# Altium PCB PCB_if-remote-control_2024-05-07.pcbdoc
Units mm, origin at the board's own origin, x right, y up, seen from the top; angles counter-clockwise.
Board outline 259.83 x 201.79 mm, 2 copper layers (Top Layer, Bottom Layer); 88 components, 109 nets, 317 pads, 10 vias.
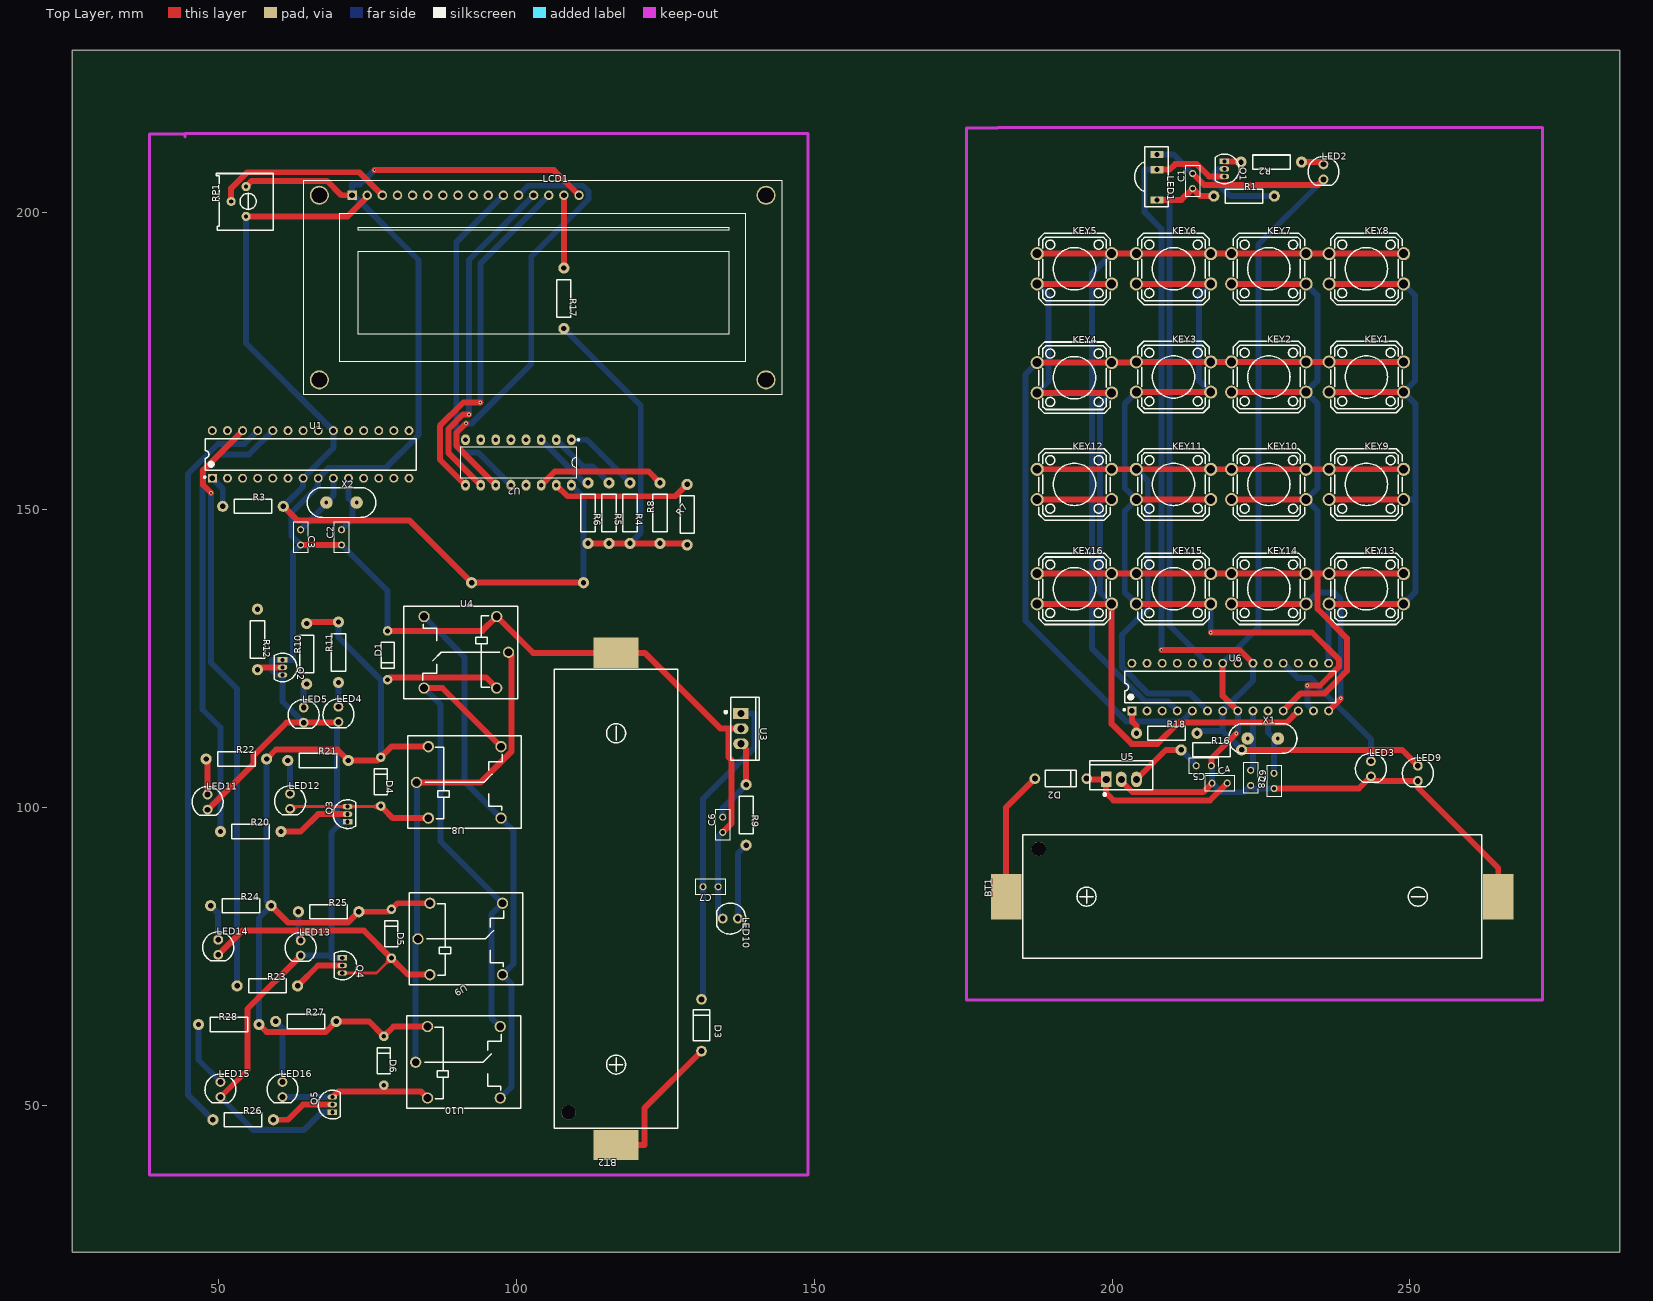
[diagram p0: Top Layer view]
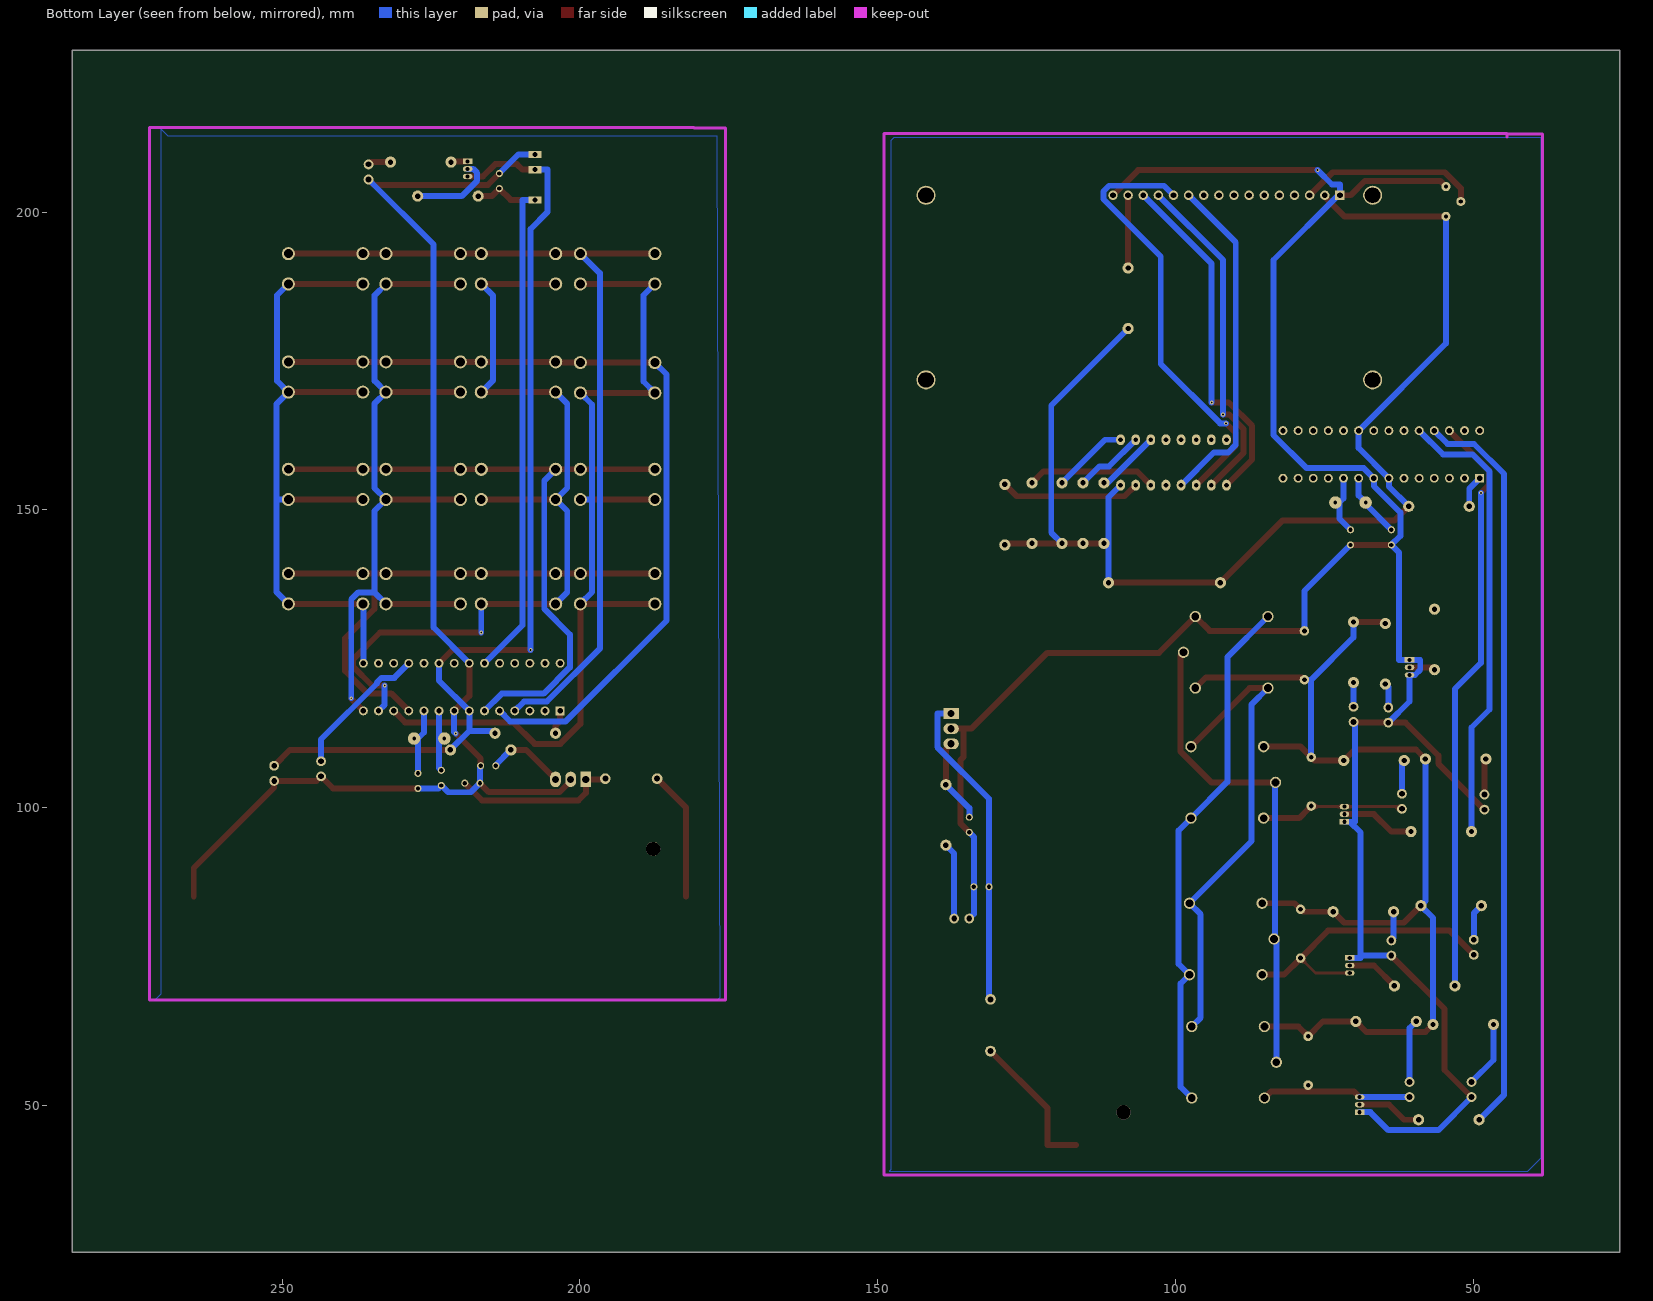
[diagram p1: Bottom Layer view, seen from below]

## Layer stack, top to bottom
Top Layer: signal copper (thickness not stored)
Dielectric: dielectric 0.32, FR-4, Dk 4.8
Bottom Layer: signal copper (thickness not stored)

## Board outline
285.234,25.4 25.4,25.4 25.4,227.195 285.234,227.195

## Components (designator, comment, footprint, x,y, rotation, side; value= is the part's Value field where it differs from the comment)
BT1 "BH-18650-B1BA002" BATTERY-SMD_18650-1S-L77.1-W20.7-1 223.516,85.086 r90 top
BT2 "BH-18650-B1BA002" BATTERY-SMD_18650-1S-L77.1-W20.7-1 116.709,84.705 r180 top
C1 "1u" RAD-0.1 213.518,205.237 r90 top
C2 "1u" RAD-0.1 70.608,145.411 r90 top
C3 "1u" RAD-0.1 63.75,145.411 r270 top
C4 "1u" RAD-0.1 218.055,104.136 r0 top
C5 "1u" RAD-0.1 215.388,107.057 r180 top
C6 "1u" RAD-0.1 134.616,97.151 r90 top
C7 "1u" RAD-0.1 132.584,86.737 r180 top
C8 "1u" RAD-0.1 223.262,105.025 r270 top
C9 "1u" RAD-0.1 227.199,104.517 r90 top
D1 "1N4148" DO-35_BD2.0-L4.2-P8.20-D0.5-RD 78.355,125.599 r90 top
D2 "1N4007" DO-41_BD2.4-L4.7-P8.70-D0.9-RD 191.385,104.898 r180 top
D3 "1N4007" DO-41_BD2.4-L4.7-P8.70-D0.9-RD 131.06,63.496 r270 top
D4 "1N4148" DO-35_BD2.0-L4.2-P8.20-D0.5-RD 77.212,104.39 r270 top
D5 "1N4148" DO-35_BD2.0-L4.2-P8.20-D0.5-RD 78.99,78.863 r270 top
D6 "1N4148" DO-35_BD2.0-L4.2-P8.20-D0.5-RD 77.72,57.527 r270 top
KEY1 "K4-12×12_TH" KEY-TH_4P-L12.0-W12.0-P5.00-LS12.5 242.693,172.335 r0 top
KEY2 "K4-12×12_TH" KEY-TH_4P-L12.0-W12.0-P5.00-LS12.5 226.31,172.335 r0 top
KEY3 "K4-12×12_TH" KEY-TH_4P-L12.0-W12.0-P5.00-LS12.5 210.308,172.335 r0 top
KEY4 "K4-12×12_TH" KEY-TH_4P-L12.0-W12.0-P5.00-LS12.5 193.671,172.208 r0 top
KEY5 "K4-12×12_TH" KEY-TH_4P-L12.0-W12.0-P5.00-LS12.5 193.671,190.496 r0 top
KEY6 "K4-12×12_TH" KEY-TH_4P-L12.0-W12.0-P5.00-LS12.5 210.308,190.496 r0 top
KEY7 "K4-12×12_TH" KEY-TH_4P-L12.0-W12.0-P5.00-LS12.5 226.31,190.496 r0 top
KEY8 "K4-12×12_TH" KEY-TH_4P-L12.0-W12.0-P5.00-LS12.5 242.693,190.496 r0 top
KEY9 "K4-12×12_TH" KEY-TH_4P-L12.0-W12.0-P5.00-LS12.5 242.693,154.301 r0 top
KEY10 "K4-12×12_TH" KEY-TH_4P-L12.0-W12.0-P5.00-LS12.5 226.31,154.301 r0 top
KEY11 "K4-12×12_TH" KEY-TH_4P-L12.0-W12.0-P5.00-LS12.5 210.308,154.301 r0 top
KEY12 "K4-12×12_TH" KEY-TH_4P-L12.0-W12.0-P5.00-LS12.5 193.671,154.301 r0 top
KEY13 "K4-12×12_TH" KEY-TH_4P-L12.0-W12.0-P5.00-LS12.5 242.693,136.775 r0 top
KEY14 "K4-12×12_TH" KEY-TH_4P-L12.0-W12.0-P5.00-LS12.5 226.31,136.775 r0 top
KEY15 "K4-12×12_TH" KEY-TH_4P-L12.0-W12.0-P5.00-LS12.5 210.308,136.775 r0 top
KEY16 "K4-12×12_TH" KEY-TH_4P-L12.0-W12.0-P5.00-LS12.5 193.671,136.775 r0 top
LCD1 "LCD1602" LCD1602 104.39,187.344 r0 top
LED1 "TSOP1736" SENSOR-TH_TSOP17XX 207.549,205.872 r270 top
LED2 "LED-TH-5mm_G" LED-TH_BD5.0_GREEN 235.489,206.761 r0 top
LED3 "ir26-21c" LED-TH_BD5.0_GREEN 243.455,106.549 r0 top
LED4 "LED-TH-5mm_G" LED-TH_BD5.0_GREEN 70.1,115.693 r0 top
LED5 "LED-TH-5mm_G" LED-TH_BD5.0_GREEN 64.258,115.566 r0 top
LED9 "LED-TH-5mm_G" LED-TH_BD5.0_GREEN 251.329,105.787 r0 top
LED10 "LED-TH-5mm_G" LED-TH_BD5.0_GREEN 135.886,81.403 r270 top
LED11 "LED-TH-5mm_G" LED-TH_BD5.0_GREEN 48.129,100.961 r0 top
LED12 "LED-TH-5mm_G" LED-TH_BD5.0_GREEN 61.972,101.088 r0 top
LED13 "LED-TH-5mm_G" LED-TH_BD5.0_GREEN 63.75,76.45 r0 top
LED14 "LED-TH-5mm_G" LED-TH_BD5.0_GREEN 49.907,76.577 r0 top
LED15 "LED-TH-5mm_G" LED-TH_BD5.0_GREEN 50.288,52.701 r0 top
LED16 "LED-TH-5mm_G" LED-TH_BD5.0_GREEN 60.702,52.701 r0 top
Q1 "2N3906(TO-92)" TO-92-3_L4.9-W3.7-P1.27-L 218.852,207.269 r270 top
Q2 "2N3904(TO-92)" ? 60.702,123.567 r270 top
Q3 "2N3904(TO-92)" ? 71.624,98.929 r90 top
Q4 "2N3904(TO-92)" ? 70.735,73.529 r270 top
Q5 "2N3904(TO-92)" ? 69.084,50.161 r90 top
R1 "1k" R_AXIAL-0.4 222.154,202.697 r0 top
R2 "1k" R_AXIAL-0.4 226.726,208.412 r180 top
R3 "10k" R_AXIAL-0.4 55.749,150.618 r0 top
R4 "10k" R_AXIAL-0.4 119.058,149.475 r270 top
R5 "10k" R_AXIAL-0.4 115.534,149.475 r270 top
R6 "10k" R_AXIAL-0.4 112.01,149.475 r270 top
R7 "10k" R_AXIAL-0.4 128.647,149.221 r90 top
R8 "10k" R_AXIAL-0.4 124.075,149.475 r90 top
R9 "1k" R_AXIAL-0.4 138.553,98.802 r270 top
R10 "1k" R_AXIAL-0.4 64.766,125.853 r90 top
R11 "1k" R_AXIAL-0.4 70.1,126.107 r90 top
R12 "1k" R_AXIAL-0.4 56.511,128.266 r270 top
R16 "1k" R_AXIAL-0.4 216.658,109.724 r0 top
R17 "470" R_AXIAL-0.4 107.946,185.543 r270 top
R18 "10k" R_AXIAL-0.4 209.165,112.518 r0 top
R20 "1k" R_AXIAL-0.4 55.368,96.008 r0 top
R21 "1k" R_AXIAL-0.4 66.671,107.946 r0 top
R22 "1k" R_AXIAL-0.4 52.955,108.2 r0 top
R23 "1k" R_AXIAL-0.4 58.162,70.1 r0 top
R24 "1k" R_AXIAL-0.4 53.717,83.562 r0 top
R25 "1k" R_AXIAL-0.4 68.449,82.546 r0 top
R26 "1k" R_AXIAL-0.4 54.098,47.621 r0 top
R27 "1k" R_AXIAL-0.4 64.639,64.131 r0 top
R28 "1k" R_AXIAL-0.4 51.685,63.623 r0 top
RP1 "R_3386P_EU" RES-ADJ-TH_3386P 53.336,201.799 r90 top
U1 "ATMEGA328P-PU" DIP-28_L34.6-W7.3-P2.54-LS10.2-BL 65.431,159.33 r0 top
U2 "PCF8574P" DIP-16_L19.3-W6.4-P2.54-LS7.6-BL 100.326,157.984 r180 top
U3 "7805(TO-220)" TO-220-3_L10.0-W4.5-P2.54-L 137.664,113.28 r270 top
U4 "RELAY-SPST" RELAY-TH_RELAY-SPST 91.563,126.107 r0 top
U5 "7805(TO-220)" TO-220-3_L10.0-W4.5-P2.54-L 201.545,104.771 r0 top
U6 "ATMEGA328P-PU" DIP-28_L34.6-W7.3-P2.54-LS10.2-BL 219.833,120.265 r0 top
U8 "RELAY-SPST" RELAY-TH_RELAY-SPST 90.293,104.263 r180 top
U9 "RELAY-SPST" RELAY-TH_RELAY-SPST 90.547,77.974 r180 top
U10 "RELAY-SPST" RELAY-TH_RELAY-SPST 90.166,57.273 r180 top
X1 "4MHz" CRISTAL_4MHZ 225.294,111.629 r0 top
X2 "4MHz" CRISTAL_4MHZ 70.608,151.253 r0 top

## Footprints (in the part's own frame and the unit in brackets; to place one, negate y for a bottom-side part, rotate by r counter-clockwise, add the part's x,y. Pads: shape width x height; smd on the part's side, far side on the other; paste and mask are expansions set on the pad)
BATTERY-SMD_18650-1S-L77.1-W20.7-1 [mm]
  rect 7.62x5.08 smd paste+0 mask+0.051: 1(0,-41.313) 2(0,41.313)
  round 2.4 hole 2.4 unplated paste+0: ""(8,35.84)
  silkscreen extent -10.35,-38.54 10.35,38.54
CRISTAL_4MHZ [mm]
  round 2.1 hole 0.6 paste+0 mask+0.051: 1(-2.54,0) 2(2.54,0)
  silkscreen extent -5.75,-2.56 5.75,2.56
DIP-16_L19.3-W6.4-P2.54-LS7.6-BL [mm]
  oval 1.46x1.825 hole 0.8 paste+0 mask+0.051: 1(-8.89,-3.81) 2(-6.35,-3.81) 3(-3.81,-3.81) 4(-1.27,-3.81) 5(1.27,-3.81) 6(3.81,-3.81) 7(6.35,-3.81) 8(8.89,-3.81) 9(8.89,3.81) 10(6.35,3.81) 11(3.81,3.81) 12(1.27,3.81) 13(-1.27,3.81) 14(-3.81,3.81) 15(-6.35,3.81) 16(-8.89,3.81)
  silkscreen extent -10.22,-3.96 9.73,2.67
DIP-28_L34.6-W7.3-P2.54-LS10.2-BL [mm]
  rect 1.5x1.5 hole 0.9 paste+0 mask+0.051: 1(-16.51,-4)
  round 1.5 hole 0.9 paste+0 mask+0.051: 2(-13.97,-4) 3(-11.43,-4) 4(-8.89,-4) 5(-6.35,-4) 6(-3.81,-4) 7(-1.27,-4) 8(1.27,-4) 9(3.81,-4) 10(6.35,-4) 11(8.89,-4) 12(11.43,-4) 13(13.97,-4) 14(16.51,-4) 15(16.51,4) 16(13.97,4) 17(11.43,4) 18(8.89,4) 19(6.35,4) 20(3.81,4) 21(1.27,4) 22(-1.27,4) 23(-3.81,4) 24(-6.35,4) 25(-8.89,4) 26(-11.43,4) 27(-13.97,4) 28(-16.51,4)
  silkscreen extent -17.94,-3.95 17.7,2.65
DO-35_BD2.0-L4.2-P8.20-D0.5-RD [mm]
  round 1.6 hole 0.8 paste+0 mask+0.051: 1(-4.1,0) 2(4.1,0)
  silkscreen extent -2.2,-1.1 2.2,1.1
DO-41_BD2.4-L4.7-P8.70-D0.9-RD [mm]
  round 1.8 hole 1 paste+0 mask+0.051: 1(-4.35,0) 2(4.35,0)
  silkscreen extent -2.6,-1.4 2.6,1.4
KEY-TH_4P-L12.0-W12.0-P5.00-LS12.5 [mm]
  round 2.2 hole 1.5 paste+0 mask+0.051: 1(-6.251,2.54) 2(6.251,2.54) 3(-6.251,-2.54) 4(6.251,-2.54)
  silkscreen extent -5.99,-6 5.99,6
LCD1602 [mm]
  round 3.2 hole 2.5 slot 2.625 at 0 deg paste+0 mask+0.051: 0(-37.5,-15.5) 0(-37.5,15.5) 0(37.5,-15.5) 0(37.5,15.5)
  rect 1.6x1.6 hole 1 paste+0 mask+0.051: 1(-32,15.5)
  round 1.6 hole 1 paste+0 mask+0.051: 2(-29.46,15.5) 3(-26.92,15.5) 4(-24.38,15.5) 5(-21.84,15.5) 6(-19.3,15.5) 7(-16.76,15.5) 8(-14.22,15.5) 9(-11.68,15.5) 10(-9.14,15.5) 11(-6.6,15.5) 12(-4.06,15.5) 13(-1.52,15.5) 14(1.02,15.5) 15(3.56,15.5) 16(6.1,15.5)
  silkscreen extent -40.13,-18.03 40.13,18.03
LED-TH_BD5.0_GREEN [mil]
  round 65 hole 38 paste+0 mask+2: 1(0,50) 2(0,-50)
  silkscreen extent -102,-88 102,102
R_AXIAL-0.4 [mil]
  round 74 hole 35.4 paste+0 mask+2: 1(-200,0) 2(200,0)
  silkscreen extent -124,-47 124,47
RAD-0.1 [mil]
  round 47 hole 28 paste+0 mask+2: 1(-50,0) 2(50,0)
  silkscreen extent -100,-50 100,50
RELAY-TH_RELAY-SPST [mm]
  round 1.9 hole 1.3 paste+0 mask+0.05: 1(-7.1,6) 2(5.1,6) 3(7.1,0) 4(5.1,-6) 5(-7.1,-6)
  silkscreen extent -10.5,-7.8 8.6,7.7
RES-ADJ-TH_3386P [mil]
  round 60 hole 27.56 paste+0 mask+2: 1(98.43,-49.21) 2(0.01,49.22) 3(-98.43,-49.21)
  silkscreen extent -190,-228 185,147
SENSOR-TH_TSOP17XX [mil]
  rect 47.7x85.9 hole 32 paste+0 mask+2: GND(-150,0) OUT(150,0) V+(-50,0)
  silkscreen extent -200,-149 194,75
TO-92-3_L4.9-W3.7-P1.27-L [mm]
  rect 0.9x1.6 hole 0.7 paste+0 mask+0.051: 1(-1.27,0)
  oval 0.9x1.6 hole 0.7 paste+0 mask+0.051: 2(0,0) 3(1.27,0)
  silkscreen extent -2.48,-1.5 2.48,2.48
TO-220-3_L10.0-W4.5-P2.54-L [mm]
  rect 1.8x2.6 hole 1.2 paste+0 mask+0.051: 1(-2.54,0.005)
  oval 1.8x2.6 hole 1.2 paste+0 mask+0.051: 2(0,0.005) 3(2.54,-0.005)
  silkscreen extent -5.3,-2.73 5.3,3.09
? [mm]
  rect 0.9x1.6 hole 0.7 paste+0 mask+0.051: 1(-1.27,0)
  oval 0.9x1.6 hole 0.7 paste+0 mask+0.051: 2(0,0) 3(1.27,0)
  silkscreen extent -2.41,-1.35 2.41,2.41

## Free pads (board coordinates)
  round 1.88 hole 0.899 paste+0 mask+0.051: 1(111.248,137.791) 2(92.452,137.791)

## Via types
v1: diameter 0.61, hole 0.305, Top Layer to Bottom Layer, tented both sides, 10 vias

## Nets (pads, with @x,y where several pads share a name; then routed paths per layer and width w, separated by ;. In a path a pad name is that pad's centre, name@x,y a point inside that pad or via, vN(x,y) a via of type N, cw(c..) or ccw(c..) an arc to the next point about the centre after c; other vN are vias at no path point)
5V: LED10.1 R9.2 | length 12.9
  Bottom Layer w1: LED10.1 137.156,92.325 R9.2
+5V: LCD1.2 pad.1 pad.2 R3.2 R4.2 R5.2 R6.2 R7.1 R8.1 R17.2 RP1.3 U1.7 U1.20 U2.16 | length 212.8
  Top Layer w1: RP1.3 71.636,199.299 74.93,202.593 LCD1.2 ; R3.2 63.193,148.254 81.989,148.254 pad.2 pad.1 ; R6.2 R5.2 R4.2 R8.1 128.393,144.395 R7.1
  Bottom Layer w1: RP1.3 54.586,177.986 U1.20 69.241,160.41 U1.7 64.161,153.95 R3.2 ; R17.2 120.855,167.554 120.855,146.191 R4.2 ; U2.16 111.248,152.142 R6.2@111.248,144.395 ; pad.1 R6.2@111.248,144.395 ; R6.2 R6.2@111.248,144.395
++5V: LED1.V+ LED9.1 Q1.3 R16.2 R18.2 U6.7 U6.20 | length 165.9
  Top Layer w1: LED1.V+ 209.64,207.142 210.57,208.073 214.21,208.073 216.284,205.999 Q1.3 ; v1(208.273,126.516) 221.392,126.516 U6.20 ; R16.2 248.662,109.724 LED9.1
  Bottom Layer w1: LED1.V+ 205.458,207.142 205.458,200.002 208.273,197.187 v1(208.273,126.516) ; R18.2 214.626,112.899 218.563,112.899 ; R16.2 218.563,112.899 ; U6.20 223.643,121.345 U6.7 218.563,112.899
COM: U4.3 U8.3 U9.3 U10.3 | length 82.3
  Top Layer w1: U8.3 93.968,104.263 99.173,109.468 99.173,125.597 U4.3
  Bottom Layer w1: U10.3 83.066,77.783 U9.3@83.256,77.974 ; U8.3 83.256,104.199 U9.3@83.256,77.974 ; U9.3 U9.3@83.256,77.974
D2_2: BT1.2 D2.2 | length 21.8
  Top Layer w1: BT1.2 182.203,100.066 D2.2
D3_2: BT2.2 D3.2 | length 24.5
  Top Layer w1: BT2.2 121.52,43.392 121.52,49.606 D3.2
DB4: LCD1.11 U2.12 | length 57.2
  Bottom Layer w1: LCD1.11 89.876,194.93 89.876,160.935 91.147,159.663 93.567,159.663 U2.12
DB5: LCD1.12 U2.11 | length 74.7
  Top Layer w1: v1(91.51,164.538) 89.904,162.932 89.904,160.786 U2.11
  Bottom Layer w1: v1(91.51,164.538) 92.504,164.538 102.471,174.505 102.471,192.559 112.092,202.18 112.092,203.507 111.154,204.445 101.932,204.445 LCD1.12
DB6: LCD1.13 U2.10 | length 57.4
  Top Layer w1: v1(92.027,166.024) 90.996,166.024 88.597,163.625 88.597,159.553 U2.10
  Bottom Layer w1: v1(92.027,166.024) 92.027,192.001 LCD1.13
DB7: LCD1.14 U2.9 | length 59.7
  Top Layer w1: U2.9 87.129,158.481 87.129,164.118 91.071,168.06 v1(93.918,168.06)
  Bottom Layer w1: v1(93.918,168.06) 93.918,191.351 LCD1.14
GND: BT2.1 C2.1 C3.2 C6.1 C7.1 D1.2 LCD1.1 LCD1.16 LED4.2 LED5.2 LED10.2 LED11.2 LED13.2 LED15.2 Q2.1 Q2.3 Q3.1 Q4.1 Q5.1 RP1.1 U1.8 U3.2 U4.2 | length 433.4
  Top Layer w1: LED11.2 55.856,107.418 55.856,108.774 61.378,114.296 LED5.2 69.973,114.296 LED4.2 ; LED15.2 54.824,55.967 54.824,66.254 LED13.2 ; RP1.1 55.542,205.255 68.178,205.255 70.589,202.844 LCD1.1 ; C3.2 C2.1 ; v1(76.136,207.068) 106.266,207.068 LCD1.16 ; D1.2 94.255,129.699 U4.2 102.752,126.018 BT2.1 119.094,126.018 121.52,126.018 134.258,113.28 135.556,113.28 ; C6.1 136.118,97.383 136.118,108.008 135.556,108.571 135.556,113.28 ; U3.2@137.669,113.28 135.556,113.28
  Bottom Layer w1: LED15.2 55.846,45.873 64.265,45.873 67.283,48.891 Q5.1 ; LED13.2 68.934,75.18 ; LED5.2 60.702,117.852 Q2.3 59.786,122.297 58.901,123.182 58.901,124.837 Q2.1 62.503,124.837 62.503,142.894 C3.2 62.225,145.666 62.225,149.551 66.701,154.027 U1.8 68.388,157.017 77.974,157.017 83.534,162.577 83.534,191.974 72.39,203.119 LCD1.1@72.39,203.441 ; LED4.2 69.823,114.146 69.823,97.659 70.724,97.659 ; C2.1 78.355,136.394 D1.2 ; Q4.1 68.934,74.799 68.934,75.18 ; Q3.1 70.724,97.659 ; LCD1.1 LCD1.1@72.39,203.441 ; v1(76.136,207.068) 73.712,204.645 72.39,204.645 LCD1.1@72.39,203.441 ; LED10.2 133.854,82.165 C7.1 133.854,95.119 C6.1 ; 68.934,75.18 68.934,95.87 70.724,97.659
GND1: BT1.1 C1.2 C4.1 C5.1 C8.2 C9.1 LED1.GND LED2.2 LED3.2 LED9.2 U5.2 U6.8 U6.22 | length 220.7
  Top Layer w1: U5.2 201.545,104.495 203.417,102.623 215.272,102.623 C4.1 ; C1.2 215.42,204.605 234.603,204.605 LED2.2 ; C5.1 216.658,108.286 v1(220.838,112.466) ; U6.22 218.563,118.805 U6.8 ; C9.1 241.423,103.247 LED3.2 244.217,104.517 LED9.2 251.329,103.397 264.829,89.897 BT1.1
  Bottom Layer w1: LED1.GND 210.343,209.682 C1.2 ; C5.1 216.785,106.93 C4.1 218.316,102.605 222.112,102.605 C8.2 223.77,103.247 C9.1 ; U6.22 224.565,130.267 224.565,194.567 LED2.2 ; v1(220.838,112.466) 221.103,112.731 U6.8
INPUT: R12.1
LCD1_3: LCD1.3 RP1.2 | length 30.3
  Top Layer w1: RP1.2 52.086,204.022 54.775,206.712 73.602,206.712 LCD1.3
LCD1_7: LCD1.7
LCD1_8: LCD1.8
LCD1_9: LCD1.9
LCD1_10: LCD1.10
LED11_1: LED11.1 R22.1 | length 6.1
  Top Layer w1: R22.1 48.129,107.946 LED11.1
LED12_1: LED12.1 R21.1 | length 5.7
  Bottom Layer w1: R21.1 61.972,107.565 LED12.1
LED13_1: LED13.1 R25.1 | length 5
  Bottom Layer w1: R25.1 63.369,78.101 LED13.1
LED14_1: LED14.1 R24.1 | length 6.2
  Bottom Layer w1: R24.1 49.907,82.292 LED14.1
LED15_1: LED15.1 R28.1 | length 11.2
  Bottom Layer w1: R28.1 46.605,57.654 LED15.1
LED16_1: LED16.1 R27.1 | length 10.6
  Bottom Layer w1: R27.1 60.702,62.988 LED16.1
NC: U4.5 U8.5 U9.5 U10.5 | length 80.7
  Top Layer w1: U4.5 87.549,120.107 U8.5
  Bottom Layer w1: U4.5 87.201,117.369 87.201,94.42 U9.5 95.774,82.101 95.774,64.765 U10.5
NO: U4.1 U8.1 U9.1 U10.1 | length 89.2
  Bottom Layer w1: U4.1 91.293,125.277 91.293,104.363 U8.1 99.482,96.174 99.482,73.809 U9.1 99.122,70.499 99.122,53.129 U10.1
P0: LCD1.6
P1: LCD1.5
P2: LCD1.4
PB0: KEY2.3 KEY2.4 KEY7.3 KEY7.4 KEY10.3 KEY10.4 KEY14.3 KEY14.4 U6.14 | length 132.5
  Top Layer w1: KEY14.3 KEY14.4 ; KEY10.3 KEY10.4 ; KEY2.3 KEY2.4 ; KEY7.3 KEY7.4 ; U6.14 238.385,118.307 v1(238.385,118.393)
  Bottom Layer w1: KEY14.4 234.501,136.176 ; KEY7.4 234.463,186.054 234.463,171.697 KEY2.4 234.501,167.854 234.501,153.702 KEY10.4 234.501,149.82 234.501,136.176 ; v1(238.385,118.393) 238.385,134.986 237.195,136.176 234.501,136.176
PB1: KEY1.3 KEY1.4 KEY8.3 KEY8.4 KEY9.3 KEY9.4 KEY13.3 KEY13.4 U6.15 | length 118.9
  Top Layer w1: KEY13.3 KEY13.4 ; KEY9.3 KEY9.4 ; KEY1.3 KEY1.4 ; KEY8.3 KEY8.4
  Bottom Layer w1: U6.15 236.343,134.136 KEY13.3 ; KEY13.4 250.909,136.2 250.909,151.761 ; KEY9.4 250.909,151.761 ; KEY8.4 250.846,186.054 250.846,171.697 KEY1.4 250.909,167.83 250.909,151.761
PB4: LED3.1 U6.18 | length 23.8
  Bottom Layer w1: U6.18 231.16,121.828 233.31,121.828 234.072,121.066 234.072,120.864 243.455,111.481 LED3.1
PC0: C1.1 LED1.OUT R1.1 U6.23 | length 93.4
  Top Layer w1: LED1.OUT 211.613,202.062 C1.1 214.788,202.697 R1.1
  Bottom Layer w1: LED1.OUT 209.64,202.062 209.64,130.648 U6.23
PC1: R20.1 U1.24 | length 76.4
  Bottom Layer w1: R20.1 50.288,113.484 47.273,116.499 47.273,156.477 50.126,159.33 55.081,159.33 U1.24
PC2: R26.1 U1.25 | length 124.9
  Bottom Layer w1: R26.1 44.823,51.816 44.823,156.036 49.877,161.09 54.301,161.09 U1.25
PC3: R23.1 U1.26 | length 98.3
  Top Layer w1: v1(48.699,152.872) 47.37,154.202 47.37,156.698 U1.26
  Bottom Layer w1: v1(48.699,152.872) 48.699,124.335 53.082,119.952 R23.1
PC4: R7.2 U2.15 | length 23.6
  Top Layer w1: U2.15 108.545,152.305 126.651,152.305 R7.2
PC5: R8.2 U2.14 | length 21.7
  Top Layer w1: U2.14 106.414,156.452 122.178,156.452 R8.2
PD2: KEY5.1 KEY5.2 KEY6.1 KEY6.2 KEY7.1 KEY7.2 KEY8.1 KEY8.2 U6.4 | length 147.8
  Top Layer w1: KEY5.1 KEY5.2 KEY6.1 KEY6.2 KEY7.1 KEY7.2 KEY8.1 KEY8.2
  Bottom Layer w1: KEY5.2 196.65,189.764 196.65,126.731 205.539,117.843 209.365,117.843 U6.4
PD3: KEY1.1 KEY1.2 KEY2.1 KEY2.2 KEY3.1 KEY3.2 KEY4.1 KEY4.2 U6.5 | length 141.5
  Top Layer w1: KEY4.1 KEY4.2 203.93,174.748 KEY3.1 KEY3.2 KEY2.1 KEY2.2 KEY1.1 KEY1.2
  Bottom Layer w1: KEY4.1 185.456,172.784 185.456,131.43 202.376,114.51 211.728,114.51 U6.5
PD4: KEY9.1 KEY9.2 KEY10.1 KEY10.2 KEY11.1 KEY11.2 KEY12.1 KEY12.2 U6.6 | length 114.8
  Top Layer w1: KEY12.1 KEY12.2 KEY11.1 KEY11.2 KEY10.1 KEY10.2 KEY9.1 KEY9.2
  Bottom Layer w1: KEY11.1 205.985,154.913 205.985,133.415 201.67,129.1 201.67,123.578 206.077,119.171 213.117,119.171 U6.6
PD5: KEY13.1 KEY13.2 KEY14.1 KEY14.2 KEY15.1 KEY15.2 KEY16.1 KEY16.2 U6.11 | length 93.4
  Top Layer w1: KEY16.1 KEY16.2 KEY15.1 KEY15.2 KEY14.1 KEY14.2 234.501,139.315 ; U6.11 231.683,119.225 235.676,119.225 239.422,122.971 239.422,128.468 234.501,133.389 234.501,139.315 ; KEY13.2 KEY13.1 234.501,139.315
PD6: KEY4.3 KEY4.4 KEY5.3 KEY5.4 KEY12.3 KEY12.4 KEY16.3 KEY16.4 U6.12 | length 164.1
  Top Layer w1: KEY16.3 KEY16.4 199.922,114.091 203.281,110.732 207.605,110.732 211.227,114.354 229.352,114.354 U6.12 ; KEY12.3 KEY12.4 ; KEY4.3 KEY4.4 ; KEY5.3 KEY5.4
  Bottom Layer w1: KEY4.3 189.322,171.57 189.322,186.054 KEY5.3 ; KEY16.4 197.958,136.199 197.958,151.761 ; KEY12.4 197.958,151.761 ; KEY4.4 197.958,167.704 197.958,151.761
PD7: KEY3.3 KEY3.4 KEY6.3 KEY6.4 KEY11.3 KEY11.4 KEY15.3 KEY15.4 U6.13 | length 149.3
  Top Layer w1: KEY15.3 KEY15.4 ; KEY11.3 KEY11.4 ; KEY3.3 KEY3.4 ; KEY6.3 KEY6.4 ; v1(216.559,129.436) 233.563,129.436 238.077,124.922 238.077,123.705 234.899,120.527 v1(232.77,120.527)
  Bottom Layer w1: KEY15.3 202.119,136.173 202.119,149.823 KEY11.3 202.119,153.699 202.119,167.857 KEY3.3 ; v1(216.559,129.436) KEY15.4 ; KEY3.4 214.573,171.781 214.573,185.97 KEY6.4 ; v1(232.77,120.527) 232.77,117.298 U6.13
Q1_1: Q1.1 R2.2 | length 2.8
  Top Layer w1: Q1.1 221.519,208.539 R2.2
Q1_2: Q1.2 R1.2 | length 14.2
  Bottom Layer w1: Q1.2 217.916,207.269 217.248,206.601 217.248,205.302 219.853,202.697 R1.2
Q3_2: Q3.2 R20.2 | length 12.4
  Top Layer w1: R20.2 63.763,96.008 66.684,98.929 Q3.2
Q4_2: Q4.2 R23.2 | length 8.9
  Top Layer w1: R23.2 66.671,73.529 Q4.2
Q5_2: Q5.2 R26.2 | length 11
  Top Layer w1: R26.2 61.617,47.621 64.157,50.161 Q5.2
R2_1: LED2.1 R2.1 | length 3.8
  Top Layer w1: R2.1 235.108,208.412 LED2.1
R3_1: R3.1 U1.1 | length 5.4
  Bottom Layer w1: U1.1 50.669,153.583 R3.1
R4_1: R4.1 U2.1 | length 12.8
  Bottom Layer w1: U2.1 111.819,161.794 R4.1
R5_1: R5.1 U2.2 | length 11.9
  Bottom Layer w1: U2.2 111.171,157.299 112.79,157.299 R5.1
R6_1: R6.1 U2.3 | length 10.9
  Bottom Layer w1: U2.3 111.375,154.555 R6.1
R10_1: LED5.1 R10.1 | length 4.1
  Bottom Layer w1: LED5.1 64.258,120.265 R10.1
R11_1: LED4.1 R11.1 | length 4.1
  Bottom Layer w1: LED4.1 R11.1
R12_2: Q2.2 R12.2 | length 4.3
  Top Layer w1: R12.2 56.892,123.567 Q2.2
R17_1: LCD1.15 R17.1 | length 12.2
  Top Layer w1: R17.1 107.95,190.627 LCD1.15
R18_1: R18.1 U6.1 | length 4.1
  Top Layer w1: U6.1 203.323,114.514 204.085,113.752 R18.1
S$36178: 
S$36188: 
U1_2: U1.2
U1_3: U1.3
U1_4: U1.4
U1_5: U1.5
U1_6: U1.6
U1_11: U1.11
U1_12: U1.12
U1_13: U1.13
U1_14: U1.14
U1_15: U1.15
U1_16: U1.16
U1_17: U1.17
U1_18: U1.18
U1_19: U1.19
U1_21: U1.21
U1_22: U1.22
U1_23: U1.23
U1_27: U1.27
U1_28: U1.28
U2_4: U2.4
U2_5: U2.5
U2_6: U2.6
U2_7: U2.7
U2_8: U2.8
U2_13: U2.13
U3_1: C7.2 D3.1 U3.1 | length 54
  Bottom Layer w1: D3.1 131.314,68.1 C7.2 131.314,101.514 139.97,110.17 139.97,115.82 U3.1@137.669,115.82
U3_3: C6.2 R9.1 U3.3 | length 14.3
  Top Layer w1: U3.3@137.659,110.74 138.553,109.846 R9.1
  Bottom Layer w1: C6.2 134.616,99.945 R9.1
U5_1: C4.2 D2.1 U5.1 | length 27.6
  Top Layer w1: D2.1 195.857,104.776 U5.1 199.005,102.475 200.229,101.251 216.44,101.251 C4.2
U5_3: C5.2 R16.1 U5.3 | length 13.3
  Top Layer w1: U5.3@204.085,104.766 209.043,109.724 R16.1
  Bottom Layer w1: R16.1 214.118,107.184 C5.2
U6_2: U6.2
U6_3: U6.3
U6_16: U6.16
U6_17: U6.17
U6_19: U6.19
U6_21: U6.21
U6_24: U6.24
U6_25: U6.25
U6_26: U6.26
U6_27: U6.27
U6_28: U6.28
U8_2: D4.2 LED12.2 Q3.3 U8.2 | length 24.3
  Top Layer w0.5: LED12.2 62.353,100.199 Q3.3 77.121,100.199 D4.2
  Top Layer w1: D4.2 77.567,99.935 79.239,98.263 U8.2
U9_2: D5.2 LED14.2 Q4.3 U9.2 | length 49.6
  Top Layer w0.5: Q4.3 76.486,72.259 D5.2
  Top Layer w1: LED14.2 53.972,79.372 74.381,79.372 D5.2 81.779,71.974 U9.2
U10_2: D6.2 LED16.2 Q5.3 U10.2 | length 26.3
  Top Layer w1: Q5.3@69.084,51.431 70.003,52.35 77.72,52.35 ; D6.2 77.72,52.35 ; U10.2 83.989,52.35 77.72,52.35
  Bottom Layer w1: LED16.2 Q5.3
VCC: D1.1 D4.1 D5.1 D6.1 R10.2 R11.2 R21.2 R22.2 R24.2 R25.2 R27.2 R28.2 U4.4 U8.4 U9.4 U10.4 | length 187.2
  Top Layer w1: R28.2 58.033,62.355 67.943,62.355 R27.2 75.216,64.131 D6.1 79.366,63.273 U10.4 ; R22.2 59.613,109.778 69.919,109.778 R21.2 76.668,107.946 D4.1 78.985,110.263 U8.4 ; R24.2 61.661,80.698 71.681,80.698 R25.2 78.573,82.546 D5.1 80.001,83.974 U9.4 ; R10.2 65.02,131.187 R11.2 ; D1.1 78.739,121.883 94.887,121.883 U4.4
  Bottom Layer w1: R28.2 56.765,81.53 R24.2 58.035,84.324 R22.2 ; R11.2 70.1,128.611 77.212,121.499 ; D4.1 77.212,121.499 ; D1.1 77.212,121.499
X1_1: C8.1 U6.9 X1.1 | length 11
  Bottom Layer w1: X1.1 X1.1@223.619,111.629 ; C8.1 223.619,106.652 X1.1@223.619,111.629 ; U6.9 223.643,111.653 X1.1@223.619,111.629
X1_2: C9.2 U6.10 X1.2 | length 11.5
  Bottom Layer w1: U6.10 226.183,112.645 X1.2@227.199,111.629 ; C9.2 X1.2@227.199,111.629 ; X1.2 X1.2@227.199,111.629
X2_1: C3.1 U1.9 X2.1 | length 10.9
  Bottom Layer w1: C3.1 68.068,150.999 X2.1 69.241,152.426 U1.9
X2_2: C2.2 U1.10 X2.2 | length 10.4
  Bottom Layer w1: C2.2 72.465,148.538 X2.2@72.465,151.253 ; U1.10 71.781,151.936 X2.2@72.465,151.253 ; X2.2 X2.2@72.465,151.253
pads on no net: BT1. BT2. LCD1.0

## Polygon pours and split planes (outlines as drawn)
GND1 on Bottom Layer (solid): 176.907,212.721 269.109,212.721 270.379,213.991 270.379,68.703 271.395,67.687 176.907,67.687 176.399,68.195
GND on Bottom Layer (solid): 38.604,212.467 147.316,212.467 147.824,211.959 147.824,39.239 148.078,38.985 40.89,38.985 38.604,41.271

## Other copper
Top Layer:
  region net U9_2: 78.192,74.813 79.04,73.964 78.397,73.816 78.043,74.17
  region net U9_2: 71.085,71.809 71.085,72.709 71.835,72.509 71.835,72.009
  region net U8_2: 71.274,99.749 71.274,100.649 70.524,100.449 70.524,99.949
  region net U8_2: 62.696,99.421 62.276,100.586 62.939,100.449 63.119,99.949
  region net U8_2: 76.735,99.648 76.635,100.844 76.106,100.449 76.148,99.949
  region net U8_2: 71.974,99.749 71.974,100.649 72.724,100.449 72.724,99.949